# EAGLE board prototypeV2.1 (EAGLE 9.4.2)
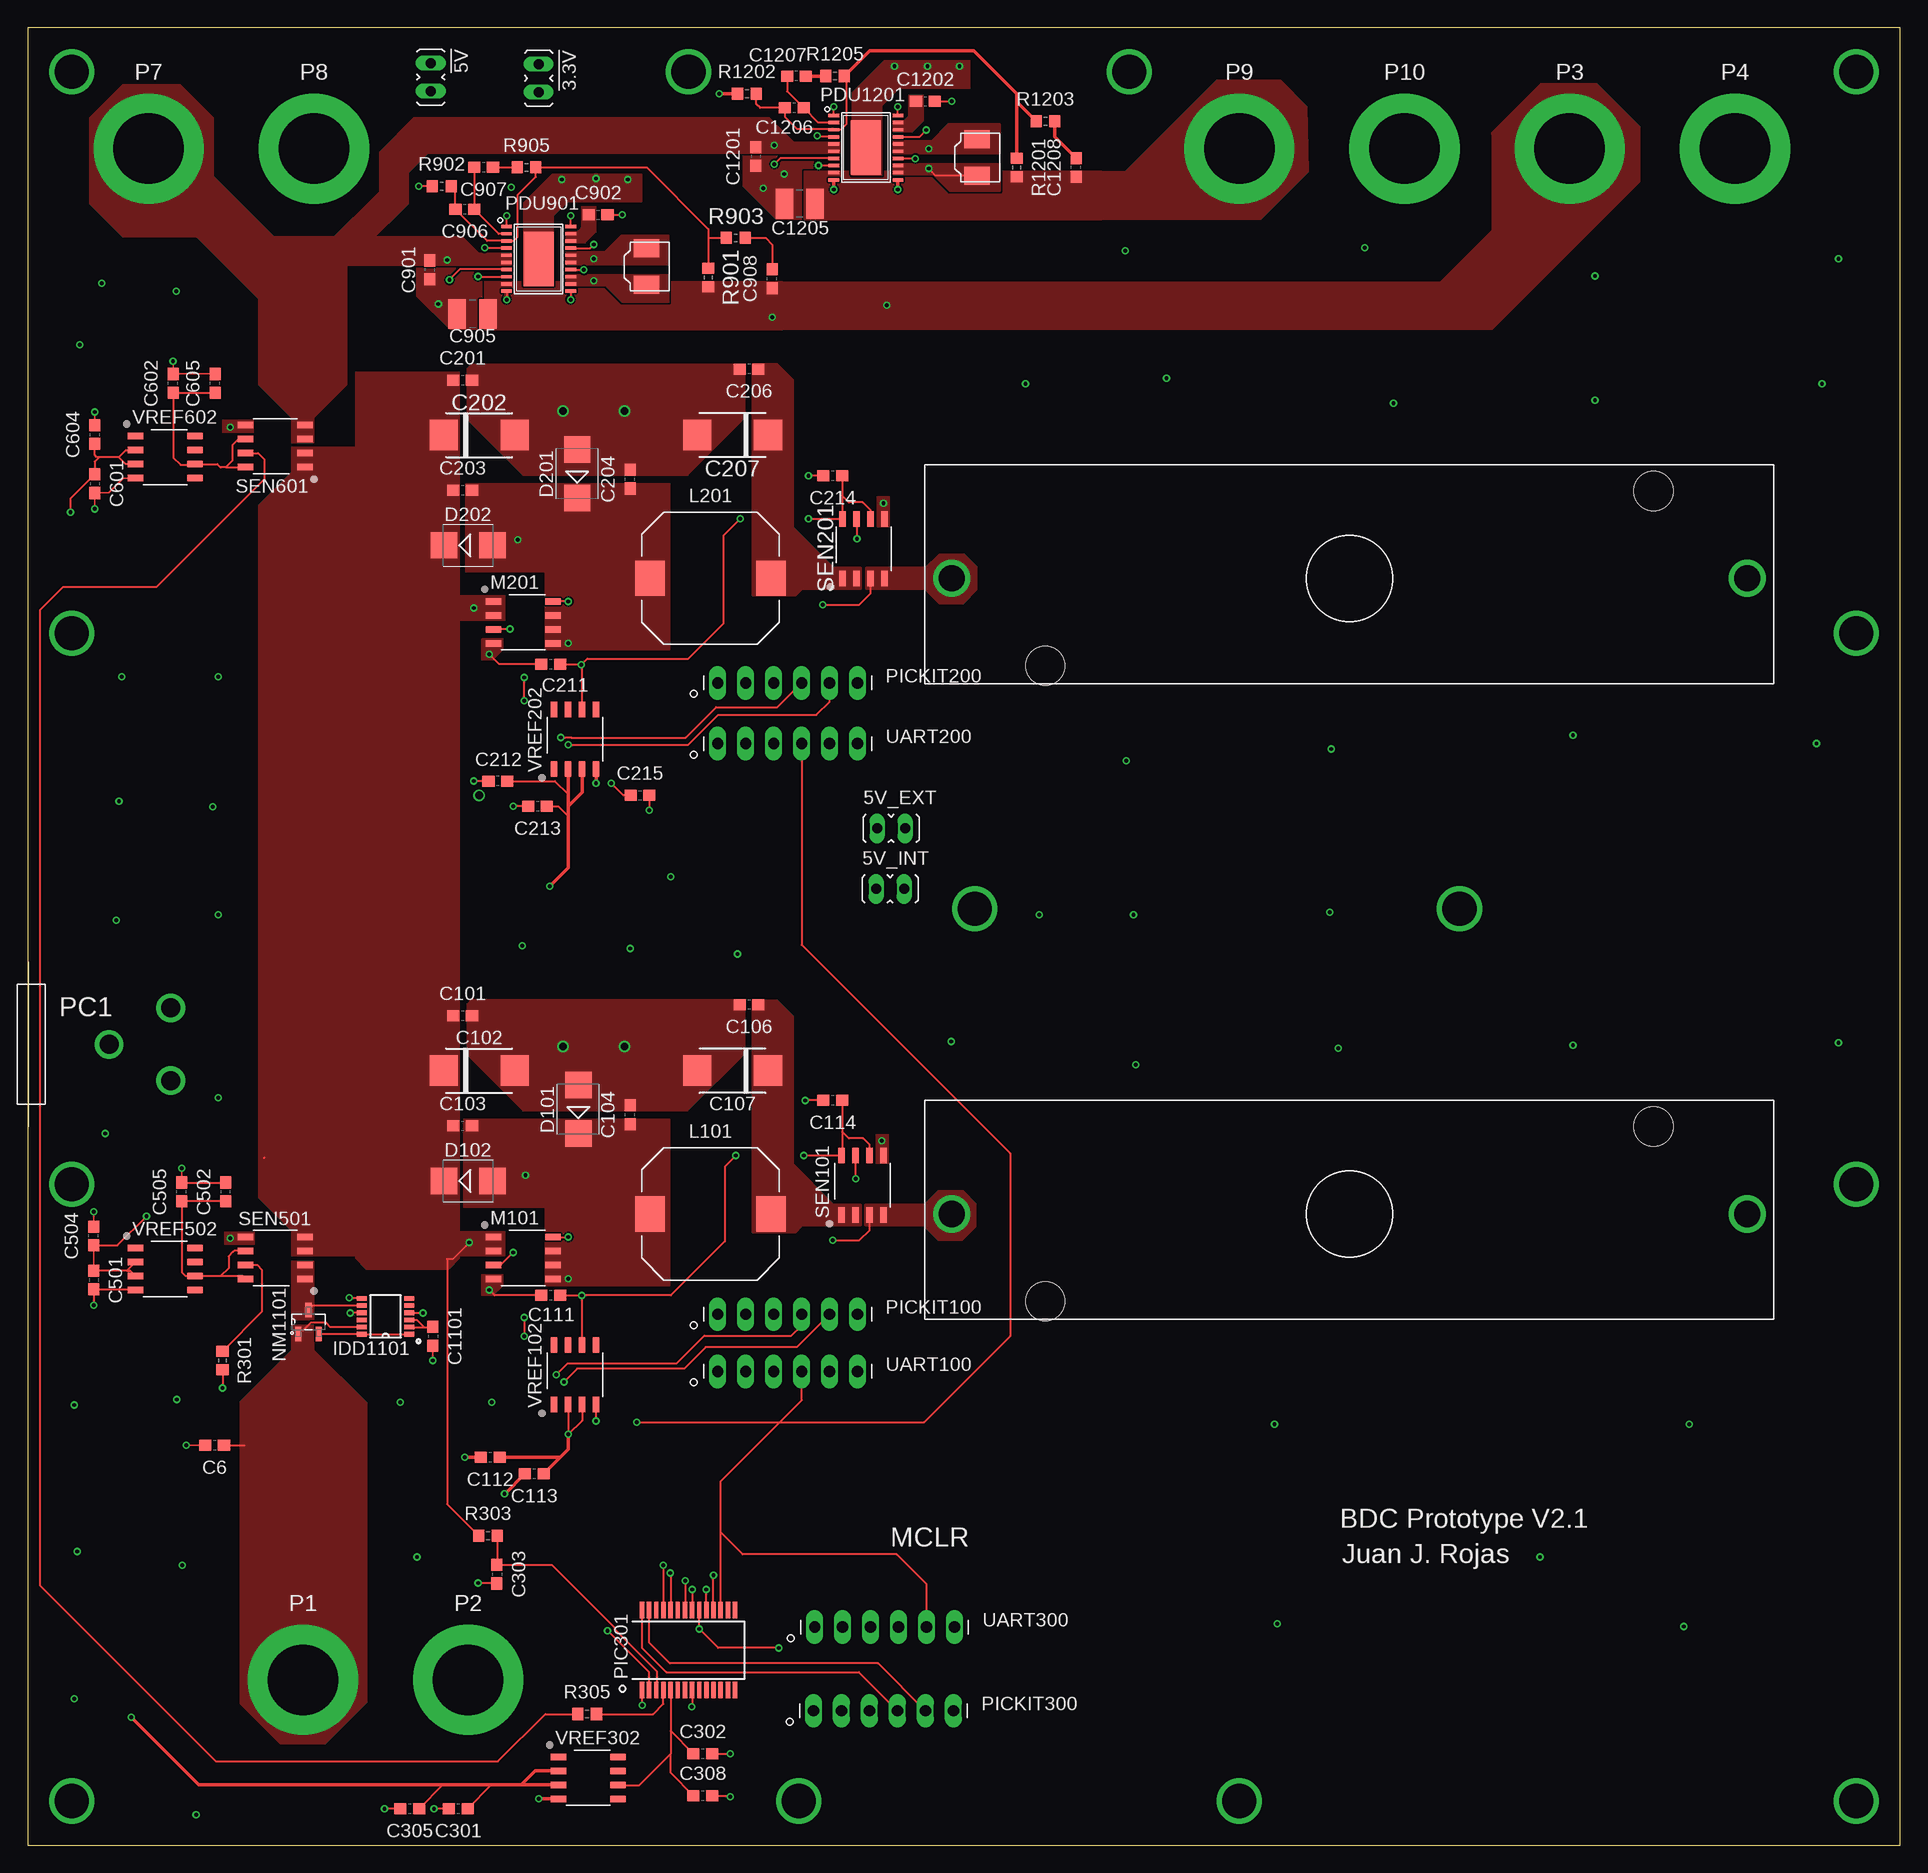
[diagram p0: board, top side]
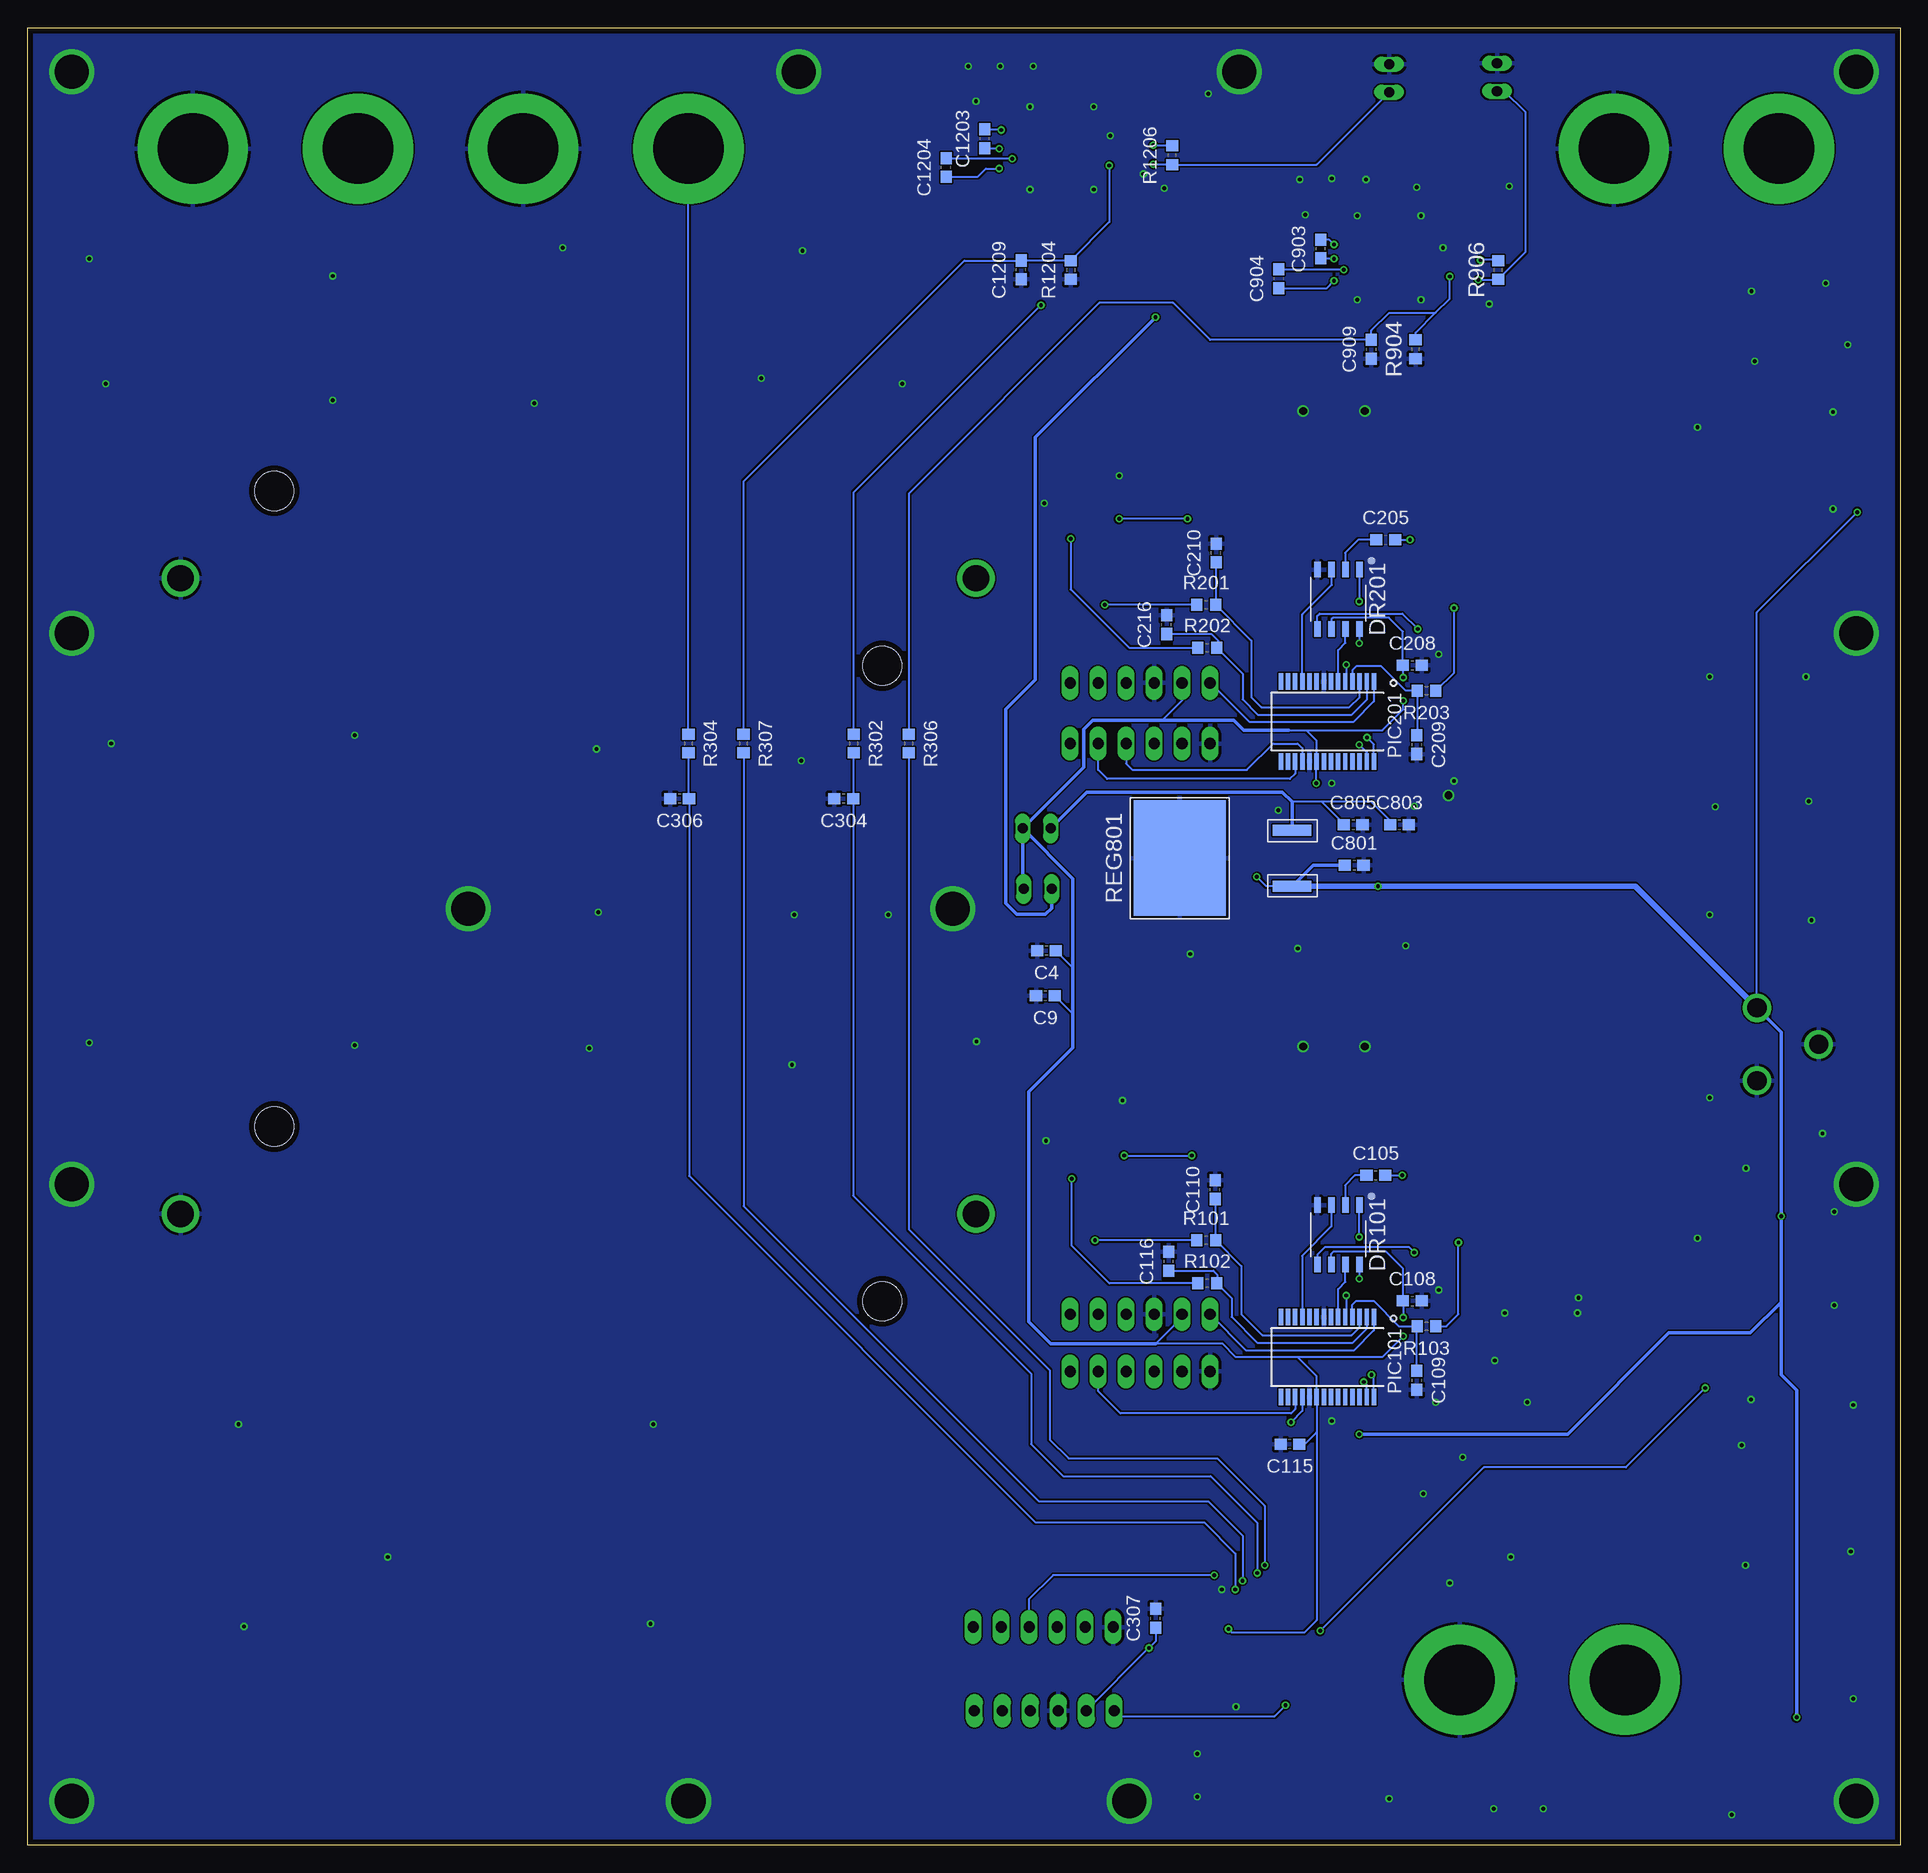
[diagram p1: board, bottom side, seen from below]

Size 170 x 165 mm. Coordinates in mm from the lower left corner, seen from the top.
Outline: 0,0 170,0 170,165 0,165 0,0
Copper layers (1*16): Top 0.035mm / dielectric 1.53mm / Bottom 0.035mm
Design rules "pban_5mil-l2": minimum track width 5mil, minimum drill 0.3mm, track to track 5mil, track to pad 0.229mm, pad to pad 5mil, via to via 5mil, smd to smd 5mil, copper to edge 0.5mm, drill to drill 0.5mm, minimum pad ring 0.15mm, minimum via ring 0.15mm, stop-mask expansion 4mil, vias tented up to drill 0.35mm, thermal gap 10mil

## Footprints (pad centres in the part's own frame; a part is rotated, then mirrored left to right if it is on the bottom)
J2P = drill 0.914 long: 1 0,-1.27; 2 0,1.27
C0603 = smd 1.1 x 1: 1 -0.85,0; 2 0.85,0
C7343 = smd 2.55 x 2.77: + -3.22,0; - 3.22,0
C1210 = smd 1.6 x 2.7: 1 -1.4,0; 2 1.4,0
18650_HOLDER = drill 2.38: BB1.N 36.11,0; BB1.P -36.11,0 | hole 3.55: 27.6,7.935; -27.6,-7.935
SMB = smd 2.4 x 2.4: A 2.2,0; C -2.2,0
SOIC-8 = smd 0.6 x 1.4: 1 -1.905,-2.7; 2 -0.635,-2.7; 3 0.635,-2.7; 4 1.905,-2.7; 5 1.905,2.7; 6 0.635,2.7; 7 -0.635,2.7; 8 -1.905,2.7
MSOP12 = smd 0.9 x 0.42: 1 -2.163,1.625; 2 -2.163,0.975; 3 -2.163,0.325; 4 -2.163,-0.325; 5 -2.163,-0.975; 6 -2.163,-1.625; 7 2.15,-1.625; 8 2.15,-0.975; 9 2.15,-0.325; 10 2.15,0.325; 11 2.15,0.975; 12 2.15,1.625
CLF12555 = smd 2.7 x 3.2: 1 -5.5,0; 2 5.5,0
SPM4020T = smd 1.65 x 2.3: 1 -1.65,0; 2 1.65,0
SOT-23 = smd 1.321 x 0.559: 1 -1.092,0.94; 2 -1.092,-0.94; 3 1.092,0
TJ-563 = drill 6.4 pad 10: P 0,0
722RA = drill 1.727: PIN 0,3.302; SLEEVE -5.588,0; SLEEVE_SHUNT 0,-3.302
TSSOP20CA = smd 0.305 x 0.991: 1 -2.925,-2.918; 2 -2.275,-2.918; 3 -1.625,-2.918; 4 -0.975,-2.918; 5 -0.325,-2.918; 6 0.325,-2.918; 7 0.975,-2.918; 8 1.625,-2.918; 9 2.275,-2.918; 10 2.925,-2.918; 11 2.925,2.918; 12 2.275,2.918; 13 1.625,2.918; 14 0.975,2.918; 15 0.325,2.918; 16 -0.325,2.918; 17 -0.975,2.918; 18 -1.625,2.918; 19 -2.275,2.918; 20 -2.925,2.918 | smd 4.95 x 2.74: 21 0,0
SSOP28 = smd 0.4 x 1.5: 1 -4.225,-3.625; 2 -3.575,-3.625; 3 -2.925,-3.625; 4 -2.275,-3.625; 5 -1.625,-3.625; 6 -0.975,-3.625; 7 -0.325,-3.625; 8 0.325,-3.625; 9 0.975,-3.625; 10 1.625,-3.625; 11 2.275,-3.625; 12 2.925,-3.625; 13 3.575,-3.625; 14 4.225,-3.625; 15 4.225,3.625; 16 3.575,3.625; 17 2.925,3.625; 18 2.275,3.625; 19 1.625,3.625; 20 0.975,3.625; 21 0.325,3.625; 22 -0.325,3.625; 23 -0.975,3.625; 24 -1.625,3.625; 25 -2.275,3.625; 26 -2.925,3.625; 27 -3.575,3.625; 28 -4.225,3.625
MA06-1 = drill 1.016 long: 1 -6.35,0; 2 -3.81,0; 3 -1.27,0; 4 1.27,0; 5 3.81,0; 6 6.35,0
R0603 = smd 1 x 1.1: 1 -0.85,0; 2 0.85,0
D2PAK-3 = smd 1.016 x 3.504: 1 -2.54,-10.213; 3 2.54,-10.213 | smd 10.49 x 8.38: 4 0,0

## Placement (x,y rotation side)
5V_EXT  [J2P]  78.4,92.3 270 top
5V_INT  [J2P]  78.3,86.8 270 top
!3.3V  [J2P]  46.4,160.4 180 top
!5V  [J2P]  36.6,160.5 180 top
C4  0.1u  [C0603]  77.5,81.2 180 bottom
C6  1u  [C0603]  16.98,36.28 180 top
C9  10u  [C0603]  77.6,77.1 180 bottom
C101  1u  [C0603]  39.5,75.3 0 top
C102  33u  [C7343]  41,70.3 0 top
C103  1n  [C0603]  39.5,65.3 0 top
C104  1n  [C0603]  54.7,66.3 90 top
C105  1u  [C0603]  47.6,60.8 0 bottom
C106  1u  [C0603]  65.5,76.3 180 top
C107  33u  [C7343]  64,70.3 180 top
C108  2.2u  [C0603]  44.3,49.4 0 bottom
C109  0.1u  [C0603]  43.9,42.2 270 bottom
C110  0.1u  [C0603]  62.2,59.5 90 bottom
C111  1u  [C0603]  47.5,49.9 180 top
C112  10u  [C0603]  42,35.2 180 top
C113  1u  [C0603]  46,33.7 180 top
C114  0.1u  [C0603]  73.1,67.6 180 top
C115  0.1u  [C0603]  55.4,36.4 180 bottom
C116  1n  [C0603]  66.4,53 90 bottom
C201  1u  [C0603]  39.5,133 0 top
C202  33u  [C7343]  41,128 0 top
C203  1n  [C0603]  39.5,123 0 top
C204  1n  [C0603]  54.7,124 90 top
C205  1u  [C0603]  46.7,118.5 0 bottom
C206  1u  [C0603]  65.5,134 180 top
C207  33u  [C7343]  64,128 180 top
C208  2.2u  [C0603]  44.3,107.1 0 bottom
C209  0.1u  [C0603]  43.9,99.9 270 bottom
C210  0.1u  [C0603]  62.1,117.3 90 bottom
C211  1u  [C0603]  47.5,107.2 180 top
C212  10u  [C0603]  42.7,96.6 180 top
C213  1u  [C0603]  46.3,94.3 180 top
C214  0.1u  [C0603]  73.1,124.3 180 top
C215  0.1u  [C0603]  55.6,95.3 0 top
C216  1n  [C0603]  66.6,110.8 90 bottom
C301  10u  [C0603]  39.1,3.3 180 top
C302  1u  [C0603]  61.3,8.3 0 top
C303  0.1u  [C0603]  42.6,24.6 270 top
C304  0.1u  [C0603]  95.9,95 180 bottom
C305  1u  [C0603]  34.7,3.3 180 top
C306  0.1u  [C0603]  110.8,95 180 bottom
C307  0.1u  [C0603]  67.6,20.6 90 bottom
C308  0.1u  [C0603]  61.3,4.5 0 top
C501  10u  [C0603]  6,51.3 270 top
C502  1u  [C0603]  18,59.3 90 top
C504  1u  [C0603]  6,55.3 90 top
C505  0.1u  [C0603]  14,59.3 90 top
C601  10u  [C0603]  6.1,123.6 270 top
C602  1u  [C0603]  13.22,132.7 90 top
C604  1u  [C0603]  6.12,128.05 90 top
C605  0.1u  [C0603]  17.02,132.7 90 top
C801  0.33u  [C0603]  49.57,88.96 0 bottom
C803  1u  [C0603]  45.46,92.63 0 bottom
C805  10u  [C0603]  49.66,92.63 0 bottom
C901  10u  [C0603]  36.5,143 270 top
C902  1u  [C0603]  51.8,148 0 top
C903  0.1u  [C0603]  52.6,144.9 90 bottom
C904  0.1u  [C0603]  56.4,142.2 90 bottom
C905  47u  [C1210]  40.4,139 180 top
C906  22p  [C0603]  39.7,148.5 180 top
C907  680p  [C0603]  41.4,152.3 180 top
C908  47p  [C0603]  67.6,142.2 90 top
C909  100p  [C0603]  48,135.8 90 bottom
C1101  0.1u  [C0603]  36.8,46.2 270 top
C1201  22u  [C0603]  66.1,153.3 270 top
C1202  1u  [C0603]  81.5,158.3 0 top
C1203  0.1u  [C0603]  83.1,154.9 90 bottom
C1204  0.1u  [C0603]  86.6,152.3 90 bottom
C1205  47u  [C1210]  70.1,149 180 top
C1206  15p  [C0603]  69.6,157.7 180 top
C1207  820p  [C0603]  69.8,160.6 180 top
C1208  56p  [C0603]  95.2,152.3 90 top
C1209  100p  [C0603]  79.8,143 90 bottom
CELL1  CELL18650_HOLDER  [18650_HOLDER]  120,57.3 0 top
CELL2  CELL18650_HOLDER  [18650_HOLDER]  120,115 0 top
D101  [SMB]  50,66.8 90 top
D102  [SMB]  40,60.3 0 top
D201  [SMB]  49.9,124.5 90 top
D202  [SMB]  40,118 0 top
DR101  TPS28225D  [SOIC-8]  51,55.4 180 bottom
DR201  TPS28225D  [SOIC-8]  51,113.1 180 bottom
IDD1101  LTC4352CMS  [MSOP12]  32.5,48 180 top
L101  22u  [CLF12555]  62,57.3 0 top
L201  22u  [CLF12555]  62,115 0 top
L901  4.7u  [SPM4020T]  56.2,143.3 270 top
L1201  4.7u  [SPM4020T]  86.2,153.2 270 top
M101  SI4914BDY  [SOIC-8]  45,53.3 270 top
M201  SI4914BDY  [SOIC-8]  45,111 270 top
NM1101  IRLML6244TRPBF  [SOT-23]  25.5,47.5 90 top
P1  TJ-563  [TJ-563]  25,15 0 top
P2  TJ-563  [TJ-563]  40,15 0 top
P3  TJ-563  [TJ-563]  140,154 0 top
P4  TJ-563  [TJ-563]  155,154 0 top
P7  TJ-563  [TJ-563]  11,154 0 top
P8  TJ-563  [TJ-563]  26,154 0 top
P9  TJ-563  [TJ-563]  110,154 0 top
P10  TJ-563  [TJ-563]  125,154 0 top
PC1  722RA  [722RA]  13,72.7 0 top
PDU901  LTC3112EFE  [TSSOP20CA]  46.4,144 270 top
PDU1201  LTC3112EFE  [TSSOP20CA]  76.1,154.1 270 top
PIC101  PIC16F1786-I/SS  [SSOP28]  52,44.3 180 bottom
PIC201  PIC16F1786-I/SS  [SSOP28]  52,102 180 bottom
PIC301  PIC16F1786-I/SS  [SSOP28]  60,17.7 0 top
PICKIT100  [MA06-1]  69,48.2 0 top
PICKIT200  [MA06-1]  69,105.5 0 top
PICKIT300  [MA06-1]  77.7,12.2 0 top
R101  200  [R0603]  63,54.9 0 bottom
R102  0  [R0603]  62.9,51 0 bottom
R103  200  [R0603]  43,47.1 180 bottom
R201  200  [R0603]  63,112.6 0 bottom
R202  0  [R0603]  62.9,108.7 0 bottom
R203  200  [R0603]  43,104.8 180 bottom
R301  0  [R0603]  17.7,44 270 top
R302  200  [R0603]  95,100 270 bottom
R303  200  [R0603]  41.8,28.1 0 top
R304  200  [R0603]  110,100 270 bottom
R305  0  [R0603]  50.8,11.9 0 top
R306  0  [R0603]  90,100 270 bottom
R307  0  [R0603]  105,100 270 bottom
R901  845k  [R0603]  61.8,142.3 270 top
R902  158k  [R0603]  37.6,150.6 0 top
R903  10k  [R0603]  64.3,145.9 0 top
R904  42.2k  [R0603]  44,135.8 90 bottom
R905  33k  [R0603]  45.3,152.3 0 top
R906  10k  [R0603]  36.5,143 90 bottom
R1201  620k  [R0603]  89.8,152.3 270 top
R1202  200k  [R0603]  65.3,159 0 top
R1203  9.1k  [R0603]  92.4,156.5 0 top
R1204  42.2k  [R0603]  75.3,143 90 bottom
R1205  39k  [R0603]  73.3,160.6 0 top
R1206  10k  [R0603]  66.1,153.4 90 bottom
REG801  NCV7805BD2TG  [D2PAK-3]  65.41,89.6 90 bottom
SEN101  ACS723-05AB-T  [SOIC-8]  75.8,59.9 0 top
SEN201  ACS723-05AB-T  [SOIC-8]  75.9,117.7 0 top
SEN501  ACS723-05AB-T  [SOIC-8]  22.5,53.3 90 top
SEN601  ACS723-05AB-T  [SOIC-8]  22.5,127 90 top
UART100  [MA06-1]  69,43 0 top
UART200  [MA06-1]  69,100 0 top
UART300  [MA06-1]  77.8,19.8 0 top
VREF102  REF195GSZ  [SOIC-8]  49.7,42.7 0 top
VREF202  REF195GSZ  [SOIC-8]  49.7,100.4 0 top
VREF302  REF195GSZ  [SOIC-8]  50.9,6.1 270 top
VREF502  REF195GSZ  [SOIC-8]  12.5,52.3 270 top
VREF602  REF195GSZ  [SOIC-8]  12.5,126 270 top

## Library data of the parts
5V_EXT 5V_INT !3.3V !5V P1-P4 P7-P10 PC1 = Interfaces
C4 C6 C9 C101-C116 C201-C216 C301-C308 C501 C502 C504 C505 C601 C602 C604 C605 C801 C803 C805 C901-C909 C1101 C1201-C1209 D101 D102 D201 D202 L101 L201 L901 L1201 R101-R103 R201-R203 R301-R307 R901-R906 R1201-R1206 = Pasives
CELL1 CELL2 = Sources
DR101 DR201 IDD1101 M101 M201 PDU901 PDU1201 PIC101 PIC201 PIC301 REG801 SEN101 SEN201 SEN501 SEN601 VREF102 VREF202 VREF302 VREF502 VREF602 = ICs
NM1101 = ICs; RS_SN: 737-7228
PICKIT100 PICKIT200 PICKIT300 UART100 UART200 UART300 = Interfaces; OC_FARNELL: unknown; OC_NEWARK: unknown

## Nets
3.3V_PL: C1205.1 C1208.1 P9.P PDU1201.9 R304.1 R1201.2
5V_ON: !5V.2 PDU901.7 R906.1
5V_PL: 5V_INT.1 C905.1 C908.1 P3.P PDU901.9 R302.1 R901.2
7.5V: C112.1 C113.1 C212.1 C213.1 C301.1 C305.1 C501.1 C504.1 C601.1 C604.1 C801.1 PC1.PIN REG801.1 VREF102.2 VREF102.3 VREF202.2 VREF202.3 VREF302.2 VREF302.3 VREF502.2 VREF502.3 VREF602.2 VREF602.3
12V_ON: !3.3V.2 PDU1201.7 R1206.1
+5V: 5V_EXT.2 5V_INT.2 C4.1 C9.1 C108.1 C115.1 C208.1 C215.1 C307.1 DR101.6 DR201.6 PIC101.20 PIC201.20 PIC301.20 PICKIT100.2 PICKIT200.2 PICKIT300.2
COM_RX: PIC101.18 PIC201.18 PIC301.17 UART100.4 UART200.4 UART300.5
CONTROL:5V_REF: C302.1 C308.1 PIC301.5 VREF302.6
CONTROL:I_LOAD: PIC301.4 R305.2
CONTROL:I_PDU_3.3V: PIC301.22 R307.2
CONTROL:I_PDU_5V: PIC301.25 R306.2
CONTROL:I_PV: PIC301.2 R301.2
CONTROL:ICSPCLK: PIC301.27 PICKIT300.5
CONTROL:ICSPDAT: PIC301.28 PICKIT300.4
CONTROL:MCLR: PIC301.1 PICKIT300.1
CONTROL:RX: PIC301.18 UART300.4
CONTROL:V_BUS: C303.1 PIC301.3 R303.2
CONTROL:V_PDU_3.3V: C306.1 PIC301.21 R304.2
CONTROL:V_PDU_5V: C304.1 PIC301.24 R302.2
CONV1:5V_REF: C111.1 C114.1 PIC101.5 SEN101.6 SEN101.8 VREF102.6
CONV1:DR_EN: DR101.7 PIC101.6
CONV1:G1: DR101.1 M101.8
CONV1:G2: DR101.5 M101.3
CONV1:I_BAT: R102.1 SEN101.7
CONV1:ICSPCLK: PIC101.27 PICKIT100.5
CONV1:ICSPDAT: PIC101.28 PICKIT100.4
CONV1:IS_BAT: C116.1 PIC101.2 R102.2
CONV1:LO: C106.1 C107.+ L101.2 SEN101.1 SEN101.2
CONV1:MCLR: PIC101.1 PICKIT100.1
CONV1:N$2: C105.1 DR101.2
CONV1:PWM: DR101.3 PIC101.11
CONV1:SW: C103.2 C104.1 C105.2 D101.C D102.A DR101.8 L101.1 M101.5 M101.6 M101.7
CONV1:TX: PIC101.17 UART100.5
CONV1:VS_BAT: C110.1 PIC101.3 R101.2
CONV1:VS_BUS: C109.1 PIC101.4 R103.2
CONV2:5V_REF: C211.1 C214.1 PIC201.5 SEN201.6 SEN201.8 VREF202.6
CONV2:DR_EN: DR201.7 PIC201.6
CONV2:G1: DR201.1 M201.8
CONV2:G2: DR201.5 M201.3
CONV2:I_BAT: R202.1 SEN201.7
CONV2:ICSPCLK: PIC201.27 PICKIT200.5
CONV2:ICSPDAT: PIC201.28 PICKIT200.4
CONV2:IS_BAT: C216.1 PIC201.2 R202.2
CONV2:LO: C206.1 C207.+ L201.2 SEN201.1 SEN201.2
CONV2:MCLR: PIC201.1 PICKIT200.1
CONV2:N$2: C205.1 DR201.2
CONV2:PWM: DR201.3 PIC201.11
CONV2:SW: C203.2 C204.1 C205.2 D201.C D202.A DR201.8 L201.1 M201.5 M201.6 M201.7
CONV2:TX: PIC201.17 UART200.5
CONV2:VS_BAT: C210.1 PIC201.3 R201.2
CONV2:VS_BUS: C209.1 PIC201.4 R203.2
GND: !3.3V.1 !5V.1 C4.2 C6.2 C9.2 C101.2 C102.- C104.2 C106.2 C107.- C108.2 C109.2 C110.2 C111.2 C112.2 C113.2 C114.2 C115.2 C116.2 C201.2 C202.- C204.2 C206.2 C207.- C208.2 C209.2 C210.2 C211.2 C212.2 C213.2 C214.2 C215.2 C216.2 C301.2 C302.2 C303.2 C304.2 C305.2 C306.2 C307.2 C308.2 C501.2 C502.2 C504.2 C505.2 C601.2 C602.2 C604.2 C605.2 C801.2 C803.2 C805.2 C901.2 C902.2 C905.2 C909.1 C1101.2 C1201.2 C1202.2 C1205.2 C1209.1 CELL1.BB1.N CELL2.BB1.N D101.A D201.A DR101.4 DR201.4 IDD1101.4 IDD1101.7 IDD1101.9 M101.4 M201.4 P2.P P4.P P8.P P10.P PC1.SLEEVE PC1.SLEEVE_SHUNT PDU901.1 PDU901.4 PDU901.10 PDU901.11 PDU901.20 PDU901.21 PDU1201.1 PDU1201.4 PDU1201.10 PDU1201.11 PDU1201.20 PDU1201.21 PIC101.8 PIC101.19 PIC201.8 PIC201.19 PIC301.8 PIC301.19 PICKIT100.3 PICKIT200.3 PICKIT300.3 R902.1 R904.1 R1202.1 R1204.1 REG801.4 SEN101.5 SEN201.5 SEN501.5 SEN601.5 UART100.1 UART200.1 UART300.1 VREF102.4 VREF202.4 VREF302.4 VREF502.4 VREF602.4
IDEAL_D1:N$1: IDD1101.1 IDD1101.12 NM1101.2
IDEAL_D1:N$4: C1101.1 IDD1101.2 IDD1101.3
IS_LOAD: R305.1 SEN601.7
IS_PDU_3.3V: C1209.2 PDU1201.8 R307.1 R1204.2
IS_PDU_5V: C909.2 PDU901.8 R306.1 R904.2
IS_PV: R301.1 SEN501.7
LOAD_BUS: C901.1 C1201.1 P7.P PDU901.5 PDU901.6 PDU1201.5 PDU1201.6 R906.2 R1206.2 SEN601.3 SEN601.4
N$1: CELL1.BB1.P R101.1 SEN101.3 SEN101.4
N$4: CELL2.BB1.P R201.1 SEN201.3 SEN201.4
N$5: 5V_EXT.1 C803.1 C805.1 REG801.3
N$6: IDD1101.8 NM1101.3 SEN501.1 SEN501.2
PDU_3.3V:N$1: C1203.2 PDU1201.17
PDU_3.3V:N$2: C1202.1 PDU1201.18 PDU1201.19
PDU_3.3V:N$3: C1204.2 PDU1201.14
PDU_3.3V:N$4: C1203.1 L1201.1 PDU1201.15 PDU1201.16
PDU_3.3V:N$5: C1207.1 R1205.1
PDU_3.3V:N$6: C1206.1 C1207.2 PDU1201.2
PDU_3.3V:N$7: C1204.1 L1201.2 PDU1201.12 PDU1201.13
PDU_3.3V:N$8: C1208.2 R1203.2
PDU_3.3V:N$9: C1206.2 PDU1201.3 R1201.1 R1202.2 R1203.1 R1205.2
PDU_5V:N$1: C903.2 PDU901.17
PDU_5V:N$2: C902.1 PDU901.18 PDU901.19
PDU_5V:N$3: C904.2 PDU901.14
PDU_5V:N$4: C903.1 L901.1 PDU901.15 PDU901.16
PDU_5V:N$5: C907.1 R905.1
PDU_5V:N$6: C906.1 C907.2 PDU901.2
PDU_5V:N$7: C904.1 L901.2 PDU901.12 PDU901.13
PDU_5V:N$8: C908.2 R903.2
PDU_5V:N$9: C906.2 PDU901.3 R901.1 R902.2 R903.1 R905.2
PV: C6.1 IDD1101.11 NM1101.1 P1.P
PV_BUS: C101.1 C102.+ C103.1 C201.1 C202.+ C203.1 D102.C D202.C M101.1 M101.2 M201.1 M201.2 R103.1 R203.1 R303.1 SEN501.3 SEN501.4 SEN601.1 SEN601.2
SENS_LOAD:5V_REF: C602.1 C605.1 SEN601.6 SEN601.8 VREF602.6
SENS_PV:5V_REF: C502.1 C505.1 SEN501.6 SEN501.8 VREF502.6

## Tracks (layer width: path | path; a pad name or v marks a point on that pad's centre or on a via)
3.3V_PL
  Bottom 0.2: R304.1 P9.P
  pour Top (isolate 0.15, rank 2, no thermals): 97.5,151.9 70.5,151.9 70.5,147.6 97.5,147.6
  pour Top (isolate 0.15, no thermals): 97.2,151.9 99.7,151.9 108,160.2 113.7,160.2 116.1,157.8 116.2,151.9 111.9,147.6 97.2,147.6
5V_ON  (via drill 0.35)
  Top 0.2: v38.3,142.1 39.3,143.1 43.41,143.1 PDU901.7
  Bottom 0.2: v38.3,142.1 36.55,142.1 R906.1 34,144.65 34,157.3 35.93,159.23 !5V.2
5V_PL  (via drill 0.35)
  Bottom 0.2: R302.1 95,122.8 v78,139.8
  Bottom 0.3: v67.6,138.7 78.5,127.8 78.5,105.8 81.2,103.1 81.2,85.5 80.2,84.5 77.6,84.5 77.03,85.07 5V_INT.1
  pour Top (isolate 0.15, rank 2, no thermals): 68.5,141.9 41.5,141.9 41.5,137.6 68.5,137.6
  pour Top (isolate 0.15, no thermals): 68.1,141.9 128.3,141.9 133,146.6 133,155.3 132.9,155.4 137.4,159.9 142.4,159.9 146.3,156 146.3,151 132.9,137.6 68.1,137.6
7.5V  (via drill 0.35)
  Top 0.152: C501.1 C504.1
  Top 0.2: 9.02,52.15 9.31,52.15 VREF502.3 | VREF502.2 9.02,52.15 | 9.02,52.15 C501.1 | VREF602.3 8.94,125.36 8.3,126 | C604.1 6.1,127.18 6.1,126.2 6.3,126 6.5,126 | 8.3,126 6.5,126 | 6.5,126 6.1,125.6 C601.1 3.9,122.25 v3.9,121 | 8.3,126 8.94,126.64 VREF602.2 | C504.1 8.15,54.45 v10.8,57.1 | VREF102.2 49.06,37.34 v49.1,37.3 50.34,38.53 VREF102.3 | C212.1 47.87,96.6 49.06,95.4 | C213.1 48.16,94.3 49.06,93.4 | 38,5.46 37.72,5.46 C305.1 | C301.1 42.12,5.46 42.5,5.46
  Top 0.3: VREF202.2 49.06,95.4 49.06,94.3 | 49.06,94.3 49.06,93.4 49.06,88.72 v47.4,87.06 | VREF202.3 50.34,95.57 49.06,94.3 | v49.1,37.3 49.1,35.95 48.35,35.2 | 48.35,35.2 C113.1 | C112.1 48.35,35.2 | 44.8,5.46 42.5,5.46 38,5.46 15.54,5.46 v9.4,11.6 | 44.8,5.46 46.07,6.74 VREF302.2 | VREF302.3 44.8,5.46
  Bottom 0.2: REG801.1 57.56,87.06 v58.4,87.9 | PC1.PIN 13,111.9 v3.9,121
  Bottom 0.3: C801.1 53.3,88.96 REG801.1 | 10.8,49.3 v10.8,57.1 10.8,73.8 PC1.PIN | 10.8,49.3 10.8,42.7 9.4,41.3 v9.4,11.6 | v49.1,37.3 30.2,37.3 21,46.5 13.6,46.5 10.8,49.3
  Bottom 0.5: PC1.PIN 24.06,87.06 v47.4,87.06 REG801.1
12V_ON  (via drill 0.35)
  Top 0.2: PDU1201.7 68.33,153.12 v67.8,152.6
  Bottom 0.2: v67.8,152.6 66.15,152.6 R1206.1 52.98,152.55 !3.3V.2
+5V  (via drill 0.35)
  Top 0.2: v45.1,103.9 v45.1,106 | v45.1,47.9 v45.1,46.2 | v68.2,17.9 62.7,17.9 v60.98,19.62 PIC301.20 | C215.1 54.1,95.3 v53,96.4
  Bottom 0.2: 53.9,101.2 52.98,100.28 PIC201.20 53,98.35 v53,96.4 | 55.5,101.2 53.9,101.2 | v45.1,106 45.1,107.05 C208.1 45.15,110.15 46.43,111.43 51.47,111.43 51.63,111.27 DR201.6 | PICKIT200.2 65.19,103.91 67,102.1 | 53.9,101.2 47,101.2 45.1,103.1 v45.1,103.9 | DR101.6 51.63,53.66 51.4,53.9 46.7,53.9 45.15,52.35 C108.1 45.1,49.35 v45.1,47.9 | v45.1,46.2 47,44.3 54.7,44.3 | 67.55,45.55 65.19,47.9 PICKIT100.2 | 54.7,44.3 52.98,42.58 PIC101.20 52.98,37.5 | 54.7,44.3 60.3,44.3 61.54,45.55 67.55,45.55 | C4.1 75.1,79.65 75.1,79.4 | C9.1 75.1,75.45 75.1,75.2 | 67.59,45.5 67.55,45.55 | 52.98,37.5 52.98,20.43 54.1,19.3 60.65,19.3 v60.98,19.62 | C307.1 67.6,18.49 v68.2,17.89 v68.2,17.9 PICKIT300.2 | C115.1 54.08,36.4 52.98,37.5
  Bottom 0.3: 5V_EXT.2 79.67,86.9 5V_INT.2 | 5V_EXT.2 74.1,97.87 74.1,101.3 73.3,102.1 67,102.1 60.5,102.1 59.6,101.2 55.5,101.2 | 5V_EXT.2 75.1,87.73 75.1,79.4 75.1,75.2 75.1,72.4 79.1,68.4 79.1,47.5 77.1,45.5 67.59,45.5
COM_RX  (via drill 0.35)
  Top 0.2: UART200.4 70.27,81.73 89.2,62.8 89.2,46.2 81.4,38.4 68.3,38.4 | v55.3,38.4 68.3,38.4 | 68.3,38.4 70.3,40.4 70.3,42.97 UART100.4 | PIC301.17 62.92,28.4 | 62.92,28.4 62.92,33.02 68.3,38.4 | UART300.5 81.61,23.69 78.9,26.4 64.92,26.4 62.92,28.4
  Bottom 0.2: UART200.4 70.27,98.17 69.7,97.6 59.3,97.6 56.9,100 54.7,100 54.27,99.58 PIC201.18 | PIC101.18 54.27,39.42 v55.3,38.4
CONTROL:5V_REF
  Top 0.2: PIC301.5 58.38,10.38 | 58.38,10.38 58.38,8.28 | 58.38,8.28 55.5,5.4 53.66,5.4 VREF302.6 | C308.1 58.38,6.58 58.38,8.28 | C302.1 58.38,10.38
CONTROL:I_LOAD
  Top 0.2: R305.2 56.8,11.9 57.73,12.82 PIC301.4
CONTROL:I_PDU_3.3V  (via drill 0.35)
  Top 0.2: PIC301.22 59.7,21.35 v59.7,24
  Bottom 0.2: R307.2 105,58 78.2,31.2 62.8,31.2 59.7,28.1 v59.7,24
CONTROL:I_PDU_5V  (via drill 0.35)
  Top 0.2: v57.7,25.4 57.7,21.35 PIC301.25
  Bottom 0.2: R306.2 90,55.9 77.2,43.1 77.2,36.8 75.5,35.1 62,35.1 57.7,30.8 v57.7,25.4
CONTROL:I_PV  (via drill 0.35)
  Top 0.2: R301.2 v17.7,41.5 | PIC301.2 56.42,15.68 v52.65,19.45
  Bottom 0.2: v17.7,41.5 24.9,34.3 37.8,34.3 v52.65,19.45
CONTROL:ICSPCLK
  Top 0.2: PICKIT300.5 77.21,16.5 58.3,16.5 56.42,18.38 PIC301.27
CONTROL:ICSPDAT
  Top 0.2: PIC301.28 55.77,17.93 58,15.7 75.47,15.7 PICKIT300.4
CONTROL:MCLR  (via drill 0.35)
  Top 0.2: v55.8,12.7 55.8,14.05 PIC301.1
  Bottom 0.2: PICKIT300.1 70.85,11.7 56.8,11.7 v55.8,12.7
CONTROL:RX  (via drill 0.35)
  Top 0.2: PIC301.18 v62.27,24.5
  Bottom 0.2: v62.27,24.5 76.9,24.5 79.1,22.3 79.1,19.83 UART300.4
CONTROL:V_BUS
  Top 0.2: R303.2 42.65,25.5 C303.1 47.58,25.45 53.3,19.72 53.3,19.6 57.1,15.8 57.1,14.1 PIC301.3
CONTROL:V_PDU_3.3V  (via drill 0.35)
  Top 0.2: v60.35,23.2 60.33,23.17 PIC301.21
  Bottom 0.2: R304.2 110,95.05 C306.1 109.95,60.75 78.5,29.3 63.2,29.3 60.35,26.45 v60.35,23.2
CONTROL:V_PDU_5V  (via drill 0.35)
  Top 0.2: v58.36,24.7 58.38,24.68 PIC301.24
  Bottom 0.2: R302.2 95.05,99.1 C304.1 95.05,58.95 78.9,42.8 78.9,36.4 76,33.5 62.6,33.5 58.36,29.26 v58.36,24.7
CONV1:5V_REF  (via drill 0.35)
  Top 0.2: v70.45,62.6 SEN101.8 73.95,62.66 73.95,64.75 | v64.3,62.6 63.3,61.6 63.3,54.8 58.4,49.9 v50.3,49.9 | VREF102.6 50.34,49.87 v50.3,49.9 | C114.1 73.95,64.75 | C111.1 v50.3,49.9 | SEN101.6 76.44,63.56 75.85,64.15 74.55,64.15 73.95,64.75
  Bottom 0.2: v70.45,62.6 v64.3,62.6 | v50.3,49.9 50.3,48 PIC101.5
CONV1:DR_EN
  Bottom 0.2: PIC101.6 51.02,50.48 50.37,51.13 DR101.7
CONV1:G1  (via drill 0.35)
  Top 0.2: M101.8 v49.09,55.2 v49.1,55.2
  Bottom 0.2: v49.1,55.2 DR101.1
CONV1:G2  (via drill 0.35)
  Top 0.2: M101.3 42.97,52.66 v44.1,53.8
  Bottom 0.2: v44.1,53.8 44.6,54.3 52.2,54.3 52.91,53.59 DR101.5
CONV1:I_BAT  (via drill 0.35)
  Top 0.2: v75.2,60.5 75.17,60.53 SEN101.7
  Bottom 0.2: R102.1 71.8,51 75.2,54.4 v75.2,60.5
CONV1:ICSPCLK  (via drill 0.35)
  Top 0.2: v48.7,42.05 49.9,43.25 59.6,43.25 61.55,45.2 69.81,45.2 PICKIT100.5
  Bottom 0.2: PIC101.27 48.42,41.77 v48.7,42.05
CONV1:ICSPDAT  (via drill 0.35)
  Top 0.2: PICKIT100.4 70.27,47.17 69.35,46.25 61.45,46.25 58.9,43.7 49,43.7 v48,42.7
  Bottom 0.2: PIC101.28 47.77,42.48 v48,42.7
CONV1:IS_BAT
  Bottom 0.2: PIC101.2 48.4,47.9 48.4,46.9 49.7,45.6 58.35,45.6 60.7,47.95 60.7,49.65 R102.2 62,51.05 62,51.8 62.35,52.15 C116.1
CONV1:LO
  pour Top (isolate 0.15, no thermals): 65.9,76.6 68,76.6 69.4,75.2 69.4,61.8 73.1,58.1 75.6,58.1 75.6,56.3 70.3,56.3 69.7,55.7 65.9,55.7
CONV1:MCLR
  Bottom 0.2: PIC101.1 47.77,46.73 49.6,44.9 59.35,44.9 PICKIT100.1
CONV1:N$2
  Bottom 0.2: C105.1 49.5,60.8 50.4,59.9 50.4,58.13 DR101.2
CONV1:PWM
  Bottom 0.2: DR101.3 51.63,56.16 54.3,53.5 54.3,47.95 PIC101.11
CONV1:SW  (via drill 0.35)
  Bottom 0.2: DR101.8 v49.09,51.41 v49.1,51.4 | C105.2 v45.2,60.8
  pour Top (isolate 0.15, no thermals): 39.6,65.9 39.6,57.9 47,57.9 47,50.8 58.3,50.8 58.3,65.9
CONV1:TX
  Bottom 0.2: PIC101.17 54.92,39.58 55.3,39.2 70.8,39.2 72.81,41.21 UART100.5
CONV1:VS_BAT
  Bottom 0.2: C110.1 62.15,58.6 R101.2 59.8,52.55 59.8,48.2 57.9,46.3 49.8,46.3 49.08,47.02 PIC101.3
CONV1:VS_BUS
  Bottom 0.2: PIC101.4 49.73,49.08 49.4,49.4 47.8,49.4 45.5,47.1 43.9,47.1 | 43.9,47.1 R103.2 | C109.1 43.9,47.1
CONV2:5V_REF  (via drill 0.35)
  Top 0.2: VREF202.6 50.34,107.09 v50.28,107.15 | v64.7,120.4 63.2,118.9 63.2,110.9 60,107.7 50.83,107.7 v50.28,107.15 | v70.9,120.4 SEN201.8 73.95,120.44 73.95,122.5 | C214.1 73.95,122.5 | C211.1 50.23,107.2 v50.28,107.15 | SEN201.6 76.53,121.17 75.8,121.9 74.55,121.9 73.95,122.5
  Bottom 0.2: v50.28,107.15 50.28,105.72 PIC201.5 | v64.7,120.4 v70.9,120.4
CONV2:DR_EN
  Bottom 0.2: PIC201.6 51.02,108.47 50.37,109.14 DR201.7
CONV2:G1  (via drill 0.35)
  Top 0.2: v49.1,112.9 M201.8
  Bottom 0.2: DR201.1 v49.09,112.91 v49.1,112.9
CONV2:G2  (via drill 0.35)
  Top 0.2: v43.8,110.4 43.77,110.36 M201.3
  Bottom 0.2: DR201.5 52.91,111.59 52.7,111.8 45.2,111.8 v43.8,110.4
CONV2:I_BAT  (via drill 0.35)
  Top 0.2: SEN201.7 75.27,118.64 v75.3,118.6
  Bottom 0.2: v75.3,118.6 75.3,114 70,108.7 R202.1
CONV2:ICSPCLK  (via drill 0.35)
  Top 0.2: v49.1,99.9 60,99.9 62.7,102.6 71.6,102.6 72.81,103.81 PICKIT200.5
  Bottom 0.2: PIC201.27 48.42,99.22 v49.1,99.9
CONV2:ICSPDAT  (via drill 0.35)
  Top 0.2: v48.4,100.55 48.82,100.55 48.83,100.55 49.37,100.55 49.38,100.55 59.75,100.55 62.5,103.3 68.07,103.3 PICKIT200.4
  Bottom 0.2: PIC201.28 47.77,99.92 v48.4,100.55
CONV2:IS_BAT
  Bottom 0.2: R202.2 61.92,108.58 | 61.92,108.58 59.7,106.35 59.7,104 58.3,102.6 49.8,102.6 48.4,104 48.4,105.6 PIC201.2 | C216.1 62.55,109.95 61.92,109.33 61.92,108.58
CONV2:LO
  pour Top (isolate 0.15, no thermals): 65.9,134.4 68,134.4 69.4,133 69.4,119.6 73.1,115.9 75.6,115.9 75.6,114.1 70.3,114.1 69.7,113.5 65.9,113.5
CONV2:MCLR
  Bottom 0.2: PIC201.1 47.77,103.83 49.6,102 59.1,102 PICKIT200.1
CONV2:N$2
  Bottom 0.2: DR201.2 50.4,115.83 50.4,117.3 49.2,118.5 C205.1
CONV2:PWM
  Bottom 0.2: PIC201.11 54.27,111.72 51.6,114.4 51.6,115.77 DR201.3
CONV2:SW  (via drill 0.35)
  Bottom 0.2: C205.2 v44.5,118.5 | DR201.8 v49.09,109.11 v49.1,109.1
  pour Top (isolate 0.15, no thermals): 39.8,123.6 39.8,115.6 47,115.6 47,108.5 58.3,108.5 58.3,123.6
CONV2:TX
  Bottom 0.2: PIC201.17 54.92,97.28 55.4,96.8 72,96.8 72.81,97.61 UART200.5
CONV2:VS_BAT
  Bottom 0.2: PIC201.3 49.08,104.22 50,103.3 58,103.3 58.9,104.2 58.9,109.35 R201.2 62.1,112.65 C210.1
CONV2:VS_BUS
  Bottom 0.2: PIC201.4 49.73,106.67 49.4,107 47.1,107 44.9,104.8 R203.2 43.85,100.8 C209.1
GND  (via drill 0.35, 0.7, 3.1 pad 4.1)
  Top 0.152: C505.2 v14,61.45 | 29.3,48.33 v29.3,48.3 | 29.2,49.62 v29.2,49.7 | 35.9,48.33 v35.9,48.3 | C1101.2 v36.8,44 | C504.2 v6,57.5 | C6.2 14.4,36.28 v14.4,36.3 | C604.2 6.12,130.1 v6.1,130.1 | C605.2 C602.2 13.22,134.7 v13.2,134.7 | VREF602.4 8.7,124.09 7.35,122.75 C601.2 v6.1,121.3
  Top 0.2: C505.2 C502.2 | VREF502.4 6.05,50.4 C501.2 v6,49 | PDU901.10 43.5,141.07 v43.5,140.3 | PDU901.11 49.32,140.3 v49.3,140.3 | PDU901.4 41.52,144.97 v41.5,144.99 | IDD1101.9 29.3,48.33 | IDD1101.7 29.2,49.62 | IDD1101.4 35.9,48.33 | PDU901.1 43.48,147.88 v43.5,147.9 | PDU901.20 49.32,147.88 v49.3,147.9 | C902.2 v54,148 | R902.1 v35.5,150.6 | C1202.2 v83.9,158.3 | PDU1201.4 71.8,155.07 | PDU1201.1 73.18,157.78 v73.2,157.8 | PDU1201.20 79.02,157.78 v79,157.8 | C214.2 v70.9,124.3 | VREF102.4 v51.6,38.5 | C211.2 42.8,107.2 v41.9,108.1 | C114.2 v70.6,67.6 | C212.2 v40.5,96.6 | C213.2 v44.1,94.3 | C111.2 42.4,49.9 v41.9,50.4 | C303.2 40.95,23.75 v40.9,23.8 | C302.2 v63.8,8.3 | C308.2 63.7,4.5 v63.8,4.4 | C301.2 v36.9,3.3 | C305.2 v32.4,3.3 | PIC301.8 60.33,12.58 v60.3,12.55 | PIC301.19 61.6,21.35 v61.6,23.2 | C215.2 v56.45,93.95
  Top 0.3: PDU1201.10 73.18,150.32 v73.2,150.3 | PDU1201.11 79.02,150.32 v79,150.3 | R1202.1 v62.8,159 | 71.8,155.07 v71.7,155.17 | VREF202.4 v51.6,96.41 v51.6,96.4 | C112.2 v39.7,35.2 | C113.2 43.35,31.9 v43.3,31.9 | VREF302.4 v46.41,4.2 v46.4,4.2
  other vias: 43.9,150.5 41,95.3 48.6,130.2 4,161 110,4 4,4 48.5,151.2 51.6,151.3 54.5,151.2 4,110 60,161 78.7,161.5 81.7,161.5 84.6,161.5 68.7,151.7 66.8,150.4 18.4,55.1 18.4,128.7 37.3,139.9 54.2,130.2 48.6,72.5 54.2,72.5 77.7,121.8 77.55,63.95 166,161 166,4 70,4 4,60 166,60 166,110 86,85 130,85 100,161 6.75,141.8 13.5,141.05 4.75,136.2 99.65,144.75 90.6,132.65 103.4,133.15 124,130.9 121.4,145 142.3,142.45 164.4,144 162.9,132.65 142.3,131.15 44.9,81.65 54.7,81.4 64.45,80.9 162.4,100 140.3,100.75 118.2,84.7 91.85,84.45 100.4,84.45 140.3,72.6 164.4,72.85 113.2,38.2 113.45,20.1 137.3,26.15 150.85,38.2 150.35,19.85 35.35,26.15 33.85,40.2 42.15,40.2 13.55,40.45 4.25,39.95 4.5,26.65 14.05,25.4 4.25,13.3 15.3,2.75 17.3,67.85 7.05,64.6 8.05,83.95 17.3,84.45 16.8,94.25 8.3,94.75 17.3,106.05 8.55,106.05 99.75,98.45 118.35,99.5 100.6,70.85 83.85,72.95 119,72.35
  pour Bottom (isolate 0.15): 0,0 0,165 170,165 170,0
  pour Top (isolate 0.15, no thermals): 45.1,141.6 45.1,149.1 47.7,151.7 55.7,151.7 55.7,149.2 49,149.2 47.7,147.9 47.7,141.6
  pour Top (isolate 0.15, no thermals): 74.9,151.6 74.9,159.1 77.8,162 85.5,162 85.5,159.5 79.1,159.5 77.5,157.9 77.5,151.6
  pour Top (isolate 0.15, rank 3, no thermals): 65,153.8 73.7,153.8 73.7,147.6 68,147.6 65,150.6
  pour Top (isolate 0.15, no thermals): 20.6,54.6 20.6,55.6 17.9,55.6 17.9,54.6
  pour Top (isolate 0.15, no thermals): 20.5,128.3 20.5,129.3 17.7,129.3 17.7,128.3
  pour Top (isolate 0.15, rank 3, no thermals): 35.4,143.8 44.1,143.8 44.1,137.6 38.4,137.6 35.4,140.6
  pour Top (isolate 0.15, rank 2, no thermals): 65.1,134.4 40.3,134.4 39.9,134 39.9,129.5 45,124.4 59.9,124.4 65.1,129.6
  pour Top (isolate 0.15, rank 2, no thermals): 65.1,76.7 40.3,76.7 39.9,76.3 39.9,71.8 45,66.7 59.9,66.7 65.1,71.9
  pour Top (isolate 0.15, no thermals): 77.2,119.7 77.2,122.4 78.2,122.4 78.2,119.7
  pour Top (isolate 0.15, no thermals): 41.3,109.5 43.1,109.5 43.1,108.5 42.2,107.6 41.3,107.6
  pour Top (isolate 0.15, no thermals): 77.1,61.9 77.1,64.5 78.1,64.5 78.1,61.9
  pour Top (isolate 0.15, no thermals): 41.3,51.8 43.1,51.8 43.1,50.8 42.2,49.9 41.3,49.9
IDEAL_D1:N$1
  Top 0.152: 26.47,46.38 NM1101.2
  Top 0.2: 26.47,46.38 IDD1101.12 IDD1101.1
IDEAL_D1:N$4
  Top 0.152: 36.77,47.02 C1101.1
  Top 0.2: IDD1101.2 36,47.02 | 36,47.02 36.77,47.02 | IDD1101.3 35.35,47.67 36,47.02
IS_LOAD
  Top 0.2: SEN601.7 20.93,126.36 21.5,125.8 21.5,124 11.7,114.2 3.2,114.2 1.12,112.12 1.12,23.58 17.1,7.6 42.7,7.6 47,11.9 R305.1
IS_PDU_3.3V  (via drill 0.35)
  Top 0.2: PDU1201.8 v71.8,152.47
  Bottom 0.2: v71.8,152.47 71.8,147.35 R1204.2 C1209.2 84.95,143.85 105,123.8 R307.1
IS_PDU_5V  (via drill 0.35)
  Top 0.2: v40.9,142.39 43.46,142.39 PDU901.8
  Bottom 0.2: 42.2,139.1 46.4,139.1 48,137.5 C909.2 62.65,136.65 66,140 72.7,140 90,122.7 R306.1 | 42.2,139.1 40.9,140.4 v40.9,142.39 | R904.2 44,137.3 42.2,139.1
IS_PV
  Top 0.2: SEN501.7 20.84,52.66 21.3,52.2 21.3,48.45 R301.1
LOAD_BUS  (via drill 0.35)
  Bottom 0.2: R906.2 36.55,143.9 v38.1,143.9 | R1206.2 67.8,154.25 v67.8,154.3
  pour Top (isolate 0.15, no thermals): 26,127.3 24,127.3 24,129.6 21,132.6 21,145.6 29,145.6 29,132.6 26,129.6
  pour Top (isolate 0.15, no thermals): 43.9,144.5 43.9,143.4 21,143.4 21,146 39.4,146 40.9,144.5
  pour Top (isolate 0.15, no thermals): 15.4,146 8.7,146 5.7,149 5.7,156.8 8.7,159.8 13.8,159.8 16.8,156.8 16.8,151.5 22.2,146.1 22.2,139.2
  pour Top (isolate 0.15, no thermals): 27.3,145.4 32,150.1 32,153.7 35.1,156.8 67.3,156.8 69.5,154.6 73.7,154.6 73.7,153.6 36.3,153.6 34.5,151.8 34.5,149 30.9,145.4
N$1  (via drill 0.35)
  Top 0.2: v73.1,54.9 75.5,54.9 76.44,55.84 SEN101.3
  Bottom 0.2: R101.1 v73.1,54.9
  pour Top (isolate 0.15, no thermals): 76.1,58.1 76.1,56.3 81.4,56.3 82.7,55 84.8,55 86,56.2 86,58.2 84.9,59.3 82.7,59.3 81.5,58.1
N$4  (via drill 0.35)
  Top 0.2: v72.2,112.6 75.5,112.6 76.53,113.64 SEN201.3
  Bottom 0.2: R201.1 v72.2,112.6
  pour Top (isolate 0.15, no thermals): 76.2,115.9 76.2,114.1 81.5,114.1 82.8,112.8 84.9,112.8 86.1,114 86.1,116 85,117.1 82.8,117.1 81.6,115.9
N$5
  Bottom 0.2: C803.1 46.31,93.01 48,94.7 52.5,94.7 | 52.5,94.7 55.2,94.7 | C805.1 50.51,92.71 52.5,94.7
  Bottom 0.3: REG801.3 55.2,94.7 56.1,95.6 73.83,95.6 5V_EXT.1
N$6
  Top 0.152: 25.88,48.98 NM1101.3
  Top 0.2: IDD1101.8 25.88,48.98
  pour Top (isolate 0.15, no thermals): 24,47.7 26,47.7 26,53 24,53
PDU_3.3V:N$1  (via drill 0.35)
  Top 0.2: PDU1201.17 80.97,155.07 v81.6,155.7
  Bottom 0.2: v81.6,155.7 83.05,155.7
  Bottom 0.3: 83.05,155.7 C1203.2
PDU_3.3V:N$2
  pour Top (isolate 0.15, no thermals): 78.6,156.5 78.6,155.6 80.3,155.6 81.3,156.6 81.3,158.8 80,158.8 80,156.9 79.6,156.5
PDU_3.3V:N$3  (via drill 0.35)
  Top 0.2: PDU1201.14 80.58,153.12
  Top 0.3: 80.58,153.12 v80.6,153.1
  Bottom 0.2: v80.6,153.1 86.55,153.1
  Bottom 0.3: 86.55,153.1 C1204.2
PDU_3.3V:N$4  (via drill 0.35)
  Bottom 0.2: C1203.1 81.85,154.05
  Bottom 0.3: 81.85,154.05 v81.8,154
  pour Top (isolate 0.15, no thermals): 78.6,154.7 78.6,153.6 88.3,153.6 88.3,156.2 83.6,156.2 82.1,154.7
PDU_3.3V:N$5
  Top 0.3: R1205.1 C1207.1
PDU_3.3V:N$6
  Top 0.2: C1207.2 68.95,159.2 C1206.1 71.78,156.38 PDU1201.2
PDU_3.3V:N$7  (via drill 0.35)
  Top 0.2: L1201.2 82.45,151.55 v81.8,152.2
  Bottom 0.2: C1204.1 83.75,151.45 83,152.2 v81.8,152.2
  pour Top (isolate 0.15, no thermals): 78.6,152.6 78.6,151.7 82.2,151.7 83.7,150.2 88.3,150.2 88.3,152.6
PDU_3.3V:N$8
  Top 0.3: C1208.2 93.25,155.1 R1203.2
PDU_3.3V:N$9
  Top 0.2: R1202.2 66.15,158.05 66.5,157.7 C1206.2 68.75,156.9 69.83,155.82 73.08,155.82 PDU1201.3 73.83,155.72 74.35,156.25 74.35,160.4
  Top 0.3: 74.35,160.4 R1205.2 76.45,162.9 85.9,162.9 89.8,159 89.8,158.25 | 89.8,158.25 R1201.1 | R1203.1 89.8,158.25
PDU_5V:N$1  (via drill 0.35)
  Top 0.2: PDU901.17 51.08,144.97 v51.4,145.3
  Bottom 0.2: v51.4,145.3 51.85,145.75 C903.2
PDU_5V:N$2
  pour Top (isolate 0.15, no thermals): 48.9,146.4 48.9,145.5 50.6,145.5 51.6,146.5 51.6,148.7 50.3,148.7 50.3,146.8 49.9,146.4
PDU_5V:N$3  (via drill 0.35)
  Top 0.2: PDU901.14 50.48,143.03 v50.5,143
  Bottom 0.2: v50.5,143 56.35,143 C904.2
PDU_5V:N$4  (via drill 0.35)
  Bottom 0.2: C903.1 51.45,144.05 v51.4,144
  pour Top (isolate 0.15, no thermals): 48.9,144.6 48.9,143.5 58.2,143.5 58.2,146.1 53.9,146.1 52.4,144.6
PDU_5V:N$5
  Top 0.2: C907.1 R905.1
PDU_5V:N$6
  Top 0.2: PDU901.2 42.77,146.28 C906.1 C907.2
PDU_5V:N$7  (via drill 0.35)
  Bottom 0.2: C904.1 52.05,141.35 v51.4,142
  pour Top (isolate 0.15, no thermals): 48.9,142.5 48.9,141.6 52.5,141.6 54,140.1 58.2,140.1 58.2,142.5
PDU_5V:N$8
  Top 0.2: R903.2 67,145.9 67.6,145.3 C908.2
PDU_5V:N$9
  Top 0.2: 61.8,145.9 61.8,146.7 56.2,152.3 R905.2 46.15,151.45 44.5,149.8 44.5,146 44.12,145.62 PDU901.3 41.73,145.62 C906.2 38.85,150.2 R902.2 | 61.8,145.9 R901.1 | 61.8,145.9 R903.1
PV
  Top 0.2: IDD1101.11 27.48,47.02 27.1,47.4 25.7,47.4 25,46.7 | C6.1 19.68,36.28 19.7,36.3
  pour Top (isolate 0.15, no thermals): 24,47.2 26,47.2 26,44.9 30.8,40.1 30.8,13 27,9.2 23,9.2 19.3,12.9 19.3,40.2 24,44.9
PV_BUS  (via drill 0.35)
  Top 0.2: 21.46,62.36 21.5,62.4 | R303.1 38.1,30.95 38.1,53.2 38.6,53.2 v40.1,54.7
  Bottom 0.2: R203.1 40.5,106.45 v40.5,112.3 | R103.1 41.2,47.1 40.1,48.2 v40.1,54.7
  pour Top (isolate 0.15, no thermals): 30.1,53.5 24,53.5 24,55.8 21,58.8 21,121.6 24,124.6 24,126.9 30.4,126.9 30.1,126.6
  pour Top (isolate 0.15, no thermals): 39.2,53.3 39.2,133.7 29.8,133.7 29.8,53.3 30.8,52.3 38.2,52.3
  pour Top (isolate 0.15, no thermals): 43.3,55.7 35.9,55.7 35.9,53.5 43.3,53.5
  pour Top (isolate 0.15, no thermals): 43.3,113.4 35.9,113.4 35.9,111.2 43.3,111.2
SENS_LOAD:5V_REF
  Top 0.2: 18,125.09 SEN601.8 | C605.1 C602.1 13.25,125.95 13.9,125.3 15.13,125.3 VREF602.6 17.23,125.36 17.5,125.09 17.6,125.09 18,125.09 | SEN601.6 19.14,127.64 18.6,127.1 18.6,125.69 18,125.09
SENS_PV:5V_REF
  Top 0.2: C502.1 C505.1 14,52 14.34,51.66 VREF502.6 17.55,51.66 | 17.55,51.66 19.53,51.66 SEN501.8 | SEN501.6 18.76,53.94 18.67,53.85 18.65,53.85 18.25,53.45 18.25,52.37 17.55,51.66

## Text on the board
tPlace: BDC Prototype V2.1 | MCLR | Juan J. Rojas